# Altium PCB PHOTODIODE_V1.2.0.PcbDoc
Units mm, origin at the board's own origin, x right, y up, seen from the top; angles counter-clockwise.
Board outline 85 x 85 mm, 4 copper layers (Top Layer, Mid-Layer 1, Mid-Layer 2, Bottom Layer); 5 components, 96 nets, 47 pads, 0 vias.
Unrouted connection lines stored in the file: 229.
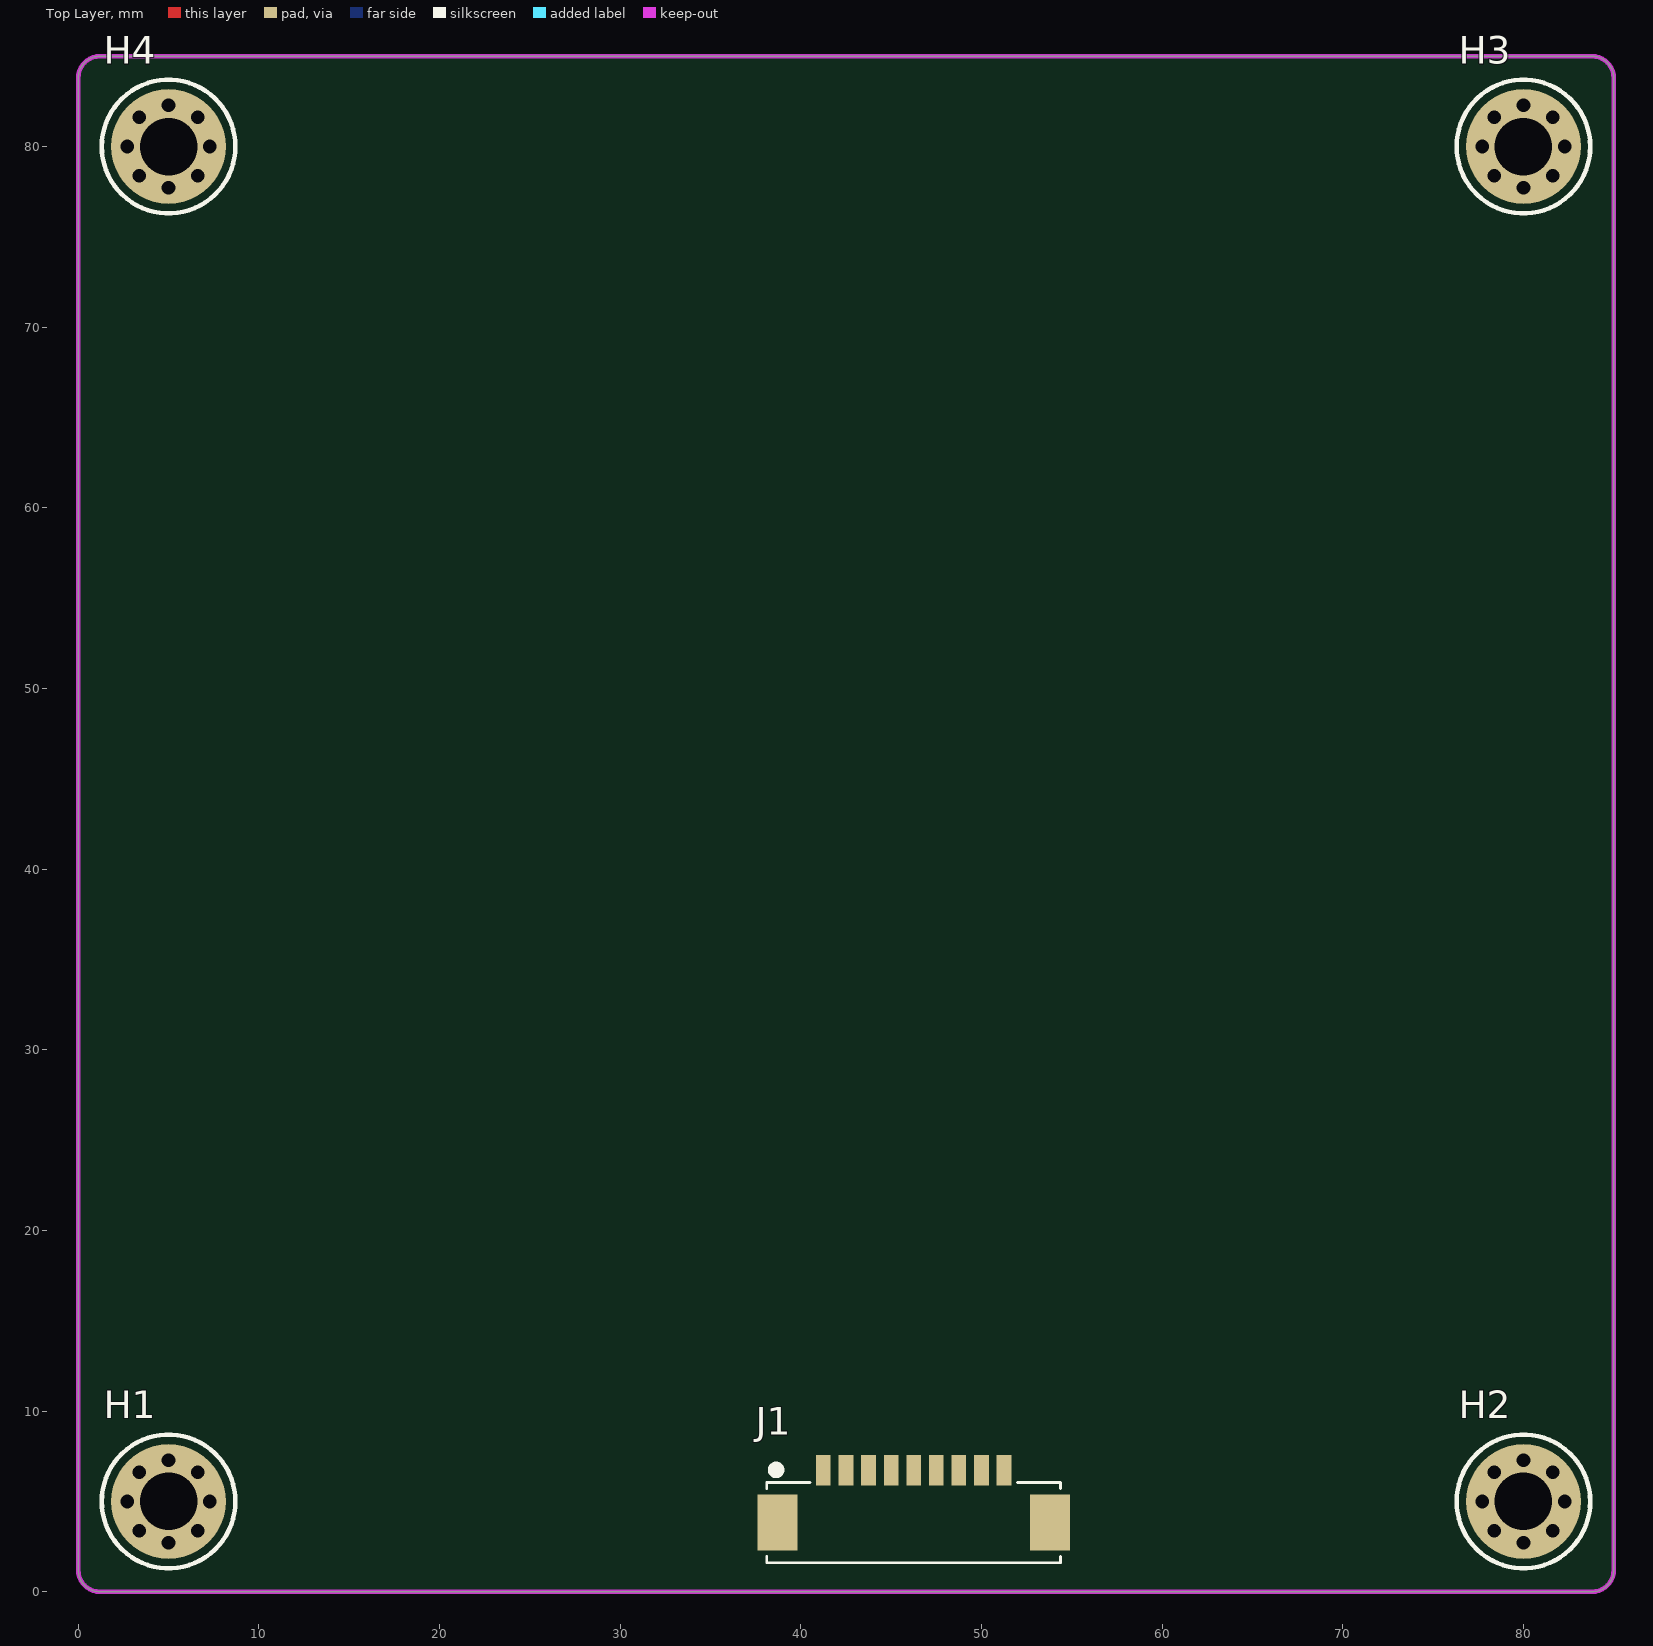
[diagram p0: Top Layer view]
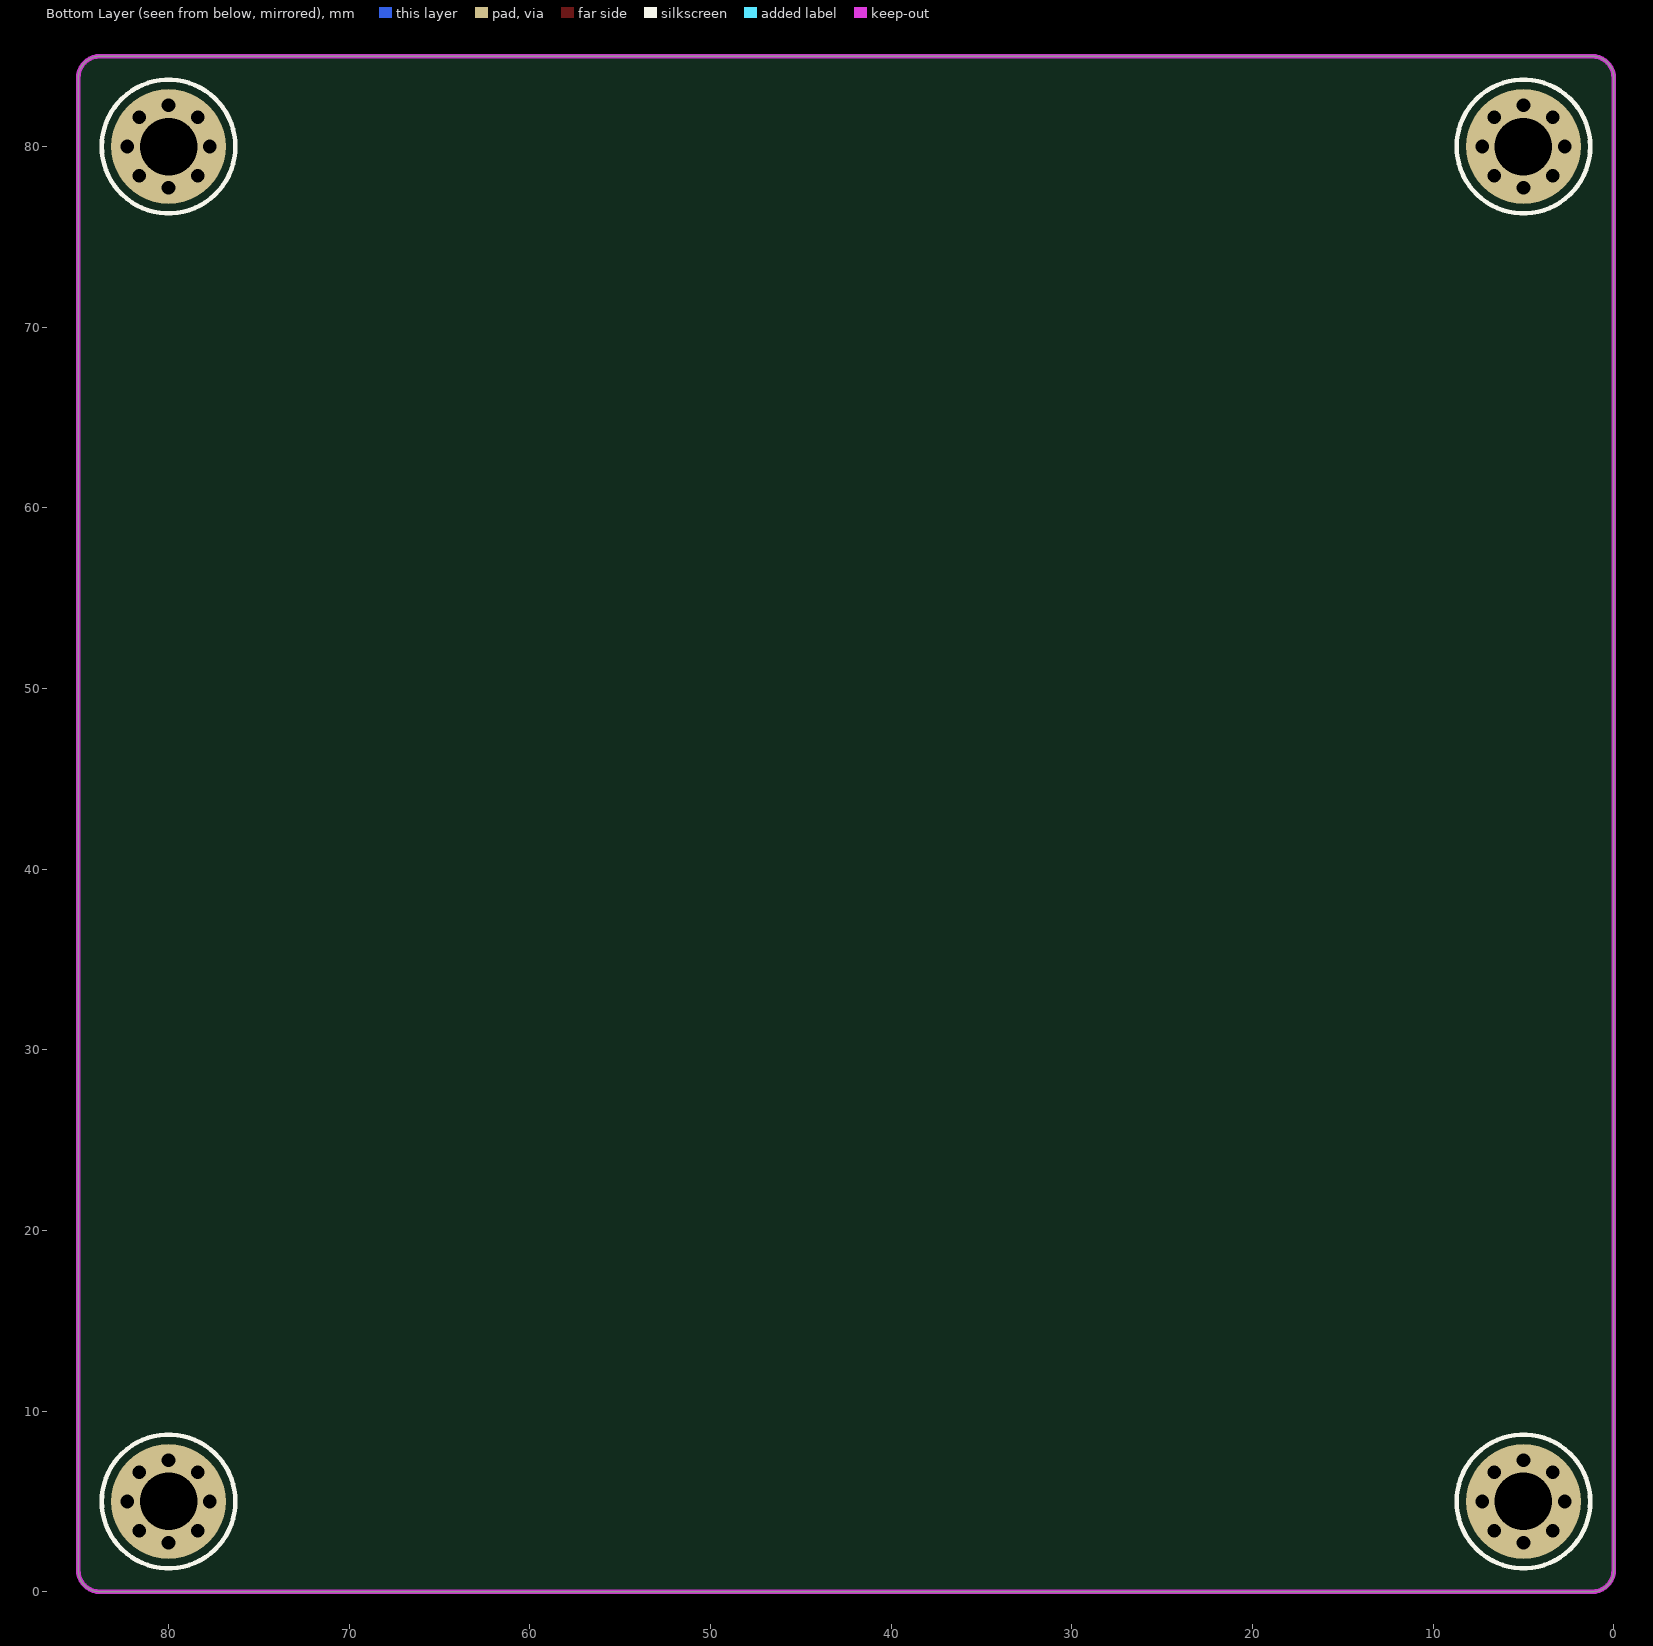
[diagram p1: Bottom Layer view, seen from below]

## Layer stack, top to bottom
Top Solder: solder mask 0.0102, Solder Resist, Dk 3.5
Top Layer: signal copper 0.0356
Dielectric 1: dielectric 0.32, FR-4, Dk 4.8
Mid-Layer 1: signal copper 0.0356
Dielectric2: dielectric 0.32, FR-4, Dk 4.8
Mid-Layer 2: signal copper 0.0356
Dielectric3: dielectric 0.32, FR-4, Dk 4.8
Bottom Layer: signal copper 0.0356
Bottom Solder: solder mask 0.0102, Solder Resist, Dk 3.5

## Board outline
0,1.2 0,83.8 cw(c1.2,83.8) 1.2,85 83.8,85 cw(c83.8,83.8) 85,83.8 85,1.2 cw(c83.8,1.2) 83.8,0 1.2,0 cw(c1.2,1.2)

## Design rules (kind name [scope] priority, off if disabled: settings)
Clearance [All] p1: gap=0.254 ignorepadtopadclearanceinfootprint=FALSE
PolygonConnect [All] p1: connectstyle=Relief reliefconductorwidth=0.254 reliefentries=4 polygonreliefangle="90 Angle" airgapwidth=0.254
RoutingVias [All] p1: holewidth=0.711 width=1.27 viastyle="Through Hole" minholewidth=0.711 minwidth=1.27 maxholewidth=0.711 maxwidth=1.27
SolderMaskExpansion [All] p1: expansion=0.102 istentingtop=FALSE
Width [All] p1: maxlimit=0.254 minlimit=0.254 preferedwidth=0.254
30 further rules are at their usual default settings.

## Components (designator, comment, footprint, x,y, rotation, side; value= is the part's Value field where it differs from the comment)
H1 "M3" M3 5,5 r0 top locked
H2 "M3" M3 80,5 r0 top locked
H3 "M3" M3 80,80 r0 top locked
H4 "M3" M3 5,80 r0 top locked
J1 "0532610971" 0532610971 46.248,3.826 r180 top

## Footprints (in the part's own frame and the unit in brackets; to place one, negate y for a bottom-side part, rotate by r counter-clockwise, add the part's x,y. Pads: shape width x height; smd on the part's side, far side on the other; paste and mask are expansions set on the pad)
0532610971 [mil] "CONN HEADER SMD R/A 9POS 1.25MM"
  rect 32x67 smd paste+0 mask+0: 1(196.85,-114.35) 2(147.64,-114.35) 3(98.43,-114.35) 4(49.21,-114.35) 5(0,-114.35) 6(-49.21,-114.35) 7(-98.43,-114.35) 8(-147.64,-114.35) 9(-196.85,-114.35)
  rect 87x122 smd paste-61 mask-61: 10(-297.24,-0.18) 11(297.24,-0.18)
  silkscreen extent -320,-123 320,88, body extent -323,-122 323,83, height 134
M3 [mil]
  round 60 hole 30: 1(-90,0) 1(-63.64,-63.64) 1(-63.64,63.64) 1(0,-90) 1(0,90) 1(63.64,-63.64) 1(63.64,63.64) 1(90,0)
  round 250 hole 125.2: 1(0,0)
  silkscreen extent -146,-146 146,146

## Part data
J1: library part JP9, "WR-PHD 2.54 mm Angled Socket Header", Manufacturer="W¨¹rth Elektronik eiSos GmbH", partNo=613009143121, ComponentLink1 Description=Manufacturer, ComponentLink1URL=http://www.we-online.com, ComponentLink2 Description=Datasheet, ComponentLink2URL=http://katalog.we-online.de/em/datasheet/6130xx143121.pdf, Created by="Karrer Zheng", Created Date="29 March 2013", NoPins=09

## Nets (pads, with @x,y where several pads share a name; then routed paths per layer and width w, separated by ;. In a path a pad name is that pad's centre, name@x,y a point inside that pad or via, vN(x,y) a via of type N, cw(c..) or ccw(c..) an arc to the next point about the centre after c; other vN are vias at no path point)
12V_EXP: J1.1
+3.3: 
ADC_CONVST: J1.8
ADC_CS: J1.7
ADC_EOC: J1.9
ADC_IN: 
GND: J1.2
MISO_PD: J1.5
MOSI_PD: J1.4
NetC1_2: 
NetC2_1: 
NetC3_2: 
NetC4_2: 
NetC6_1: 
NetC8_1: 
NetC9_2: 
NetC11_1: 
NetC13_1: 
NetC14_1: 
NetC14_2: 
NetC15_1: 
NetC18_1: 
NetC19_2: 
NetC20_1: 
NetC173_1: 
NetC207_1: 
NetC213_1: 
NetDS1_1: 
NetDS2_1: 
NetJ2_3: 
NetPD1_2: 
NetPD2_2: 
NetPD3_2: 
NetPD4_2: 
NetPD5_2: 
NetPD6_2: 
NetPD7_2: 
NetPD8_2: 
NetPD9_2: 
NetPD10_2: 
NetPD11_2: 
NetPD12_2: 
NetPD13_2: 
NetPD14_2: 
NetPD15_2: 
NetPD16_2: 
NetPD17_2: 
NetPD18_2: 
NetPD19_2: 
NetPD20_2: 
NetPD21_2: 
NetPD22_2: 
NetPD23_2: 
NetPD24_2: 
NetPD25_2: 
NetPD26_2: 
NetPD27_2: 
NetPD28_2: 
NetPD29_2: 
NetPD30_2: 
NetPD31_2: 
NetPD32_2: 
NetPD33_2: 
NetPD34_2: 
NetPD35_2: 
NetPD36_2: 
NetPD37_2: 
NetPD38_2: 
NetPD39_2: 
NetPD40_2: 
NetPD41_2: 
NetPD42_2: 
NetPD43_2: 
NetPD44_2: 
NetPD45_2: 
NetPD46_2: 
NetPD47_2: 
NetPD48_2: 
NetR3_1: 
NetR4_1: 
NetR5_1: 
NetR8_1: 
NetR16_1: 
NetR20_1: 
NetR21_1: 
PHOTODIODE: 
SCK_PD: J1.3
SDO_1: 
SDO_2: 
SDO_3: 
SDO_4: 
SDO_5: 
SHIELD: H1.1 H2.1 H3.1 H4.1
SW_CS: J1.6
VREF_ADC: 
VREF_PD: 
pads on no net: J1.10 J1.11

## Keep-outs
Keep-Out Layer:
  the board outline again, w0.254